# Altium PCB drive.PcbDoc
Units mil, origin at the board's own origin, x right, y up, seen from the top; angles counter-clockwise.
Board outline 5905.51 x 3937.01 mil, 2 copper layers (Top Layer, Bottom Layer); 75 components, 113 nets, 301 pads, 0 vias.
Unrouted connection lines stored in the file: 12.
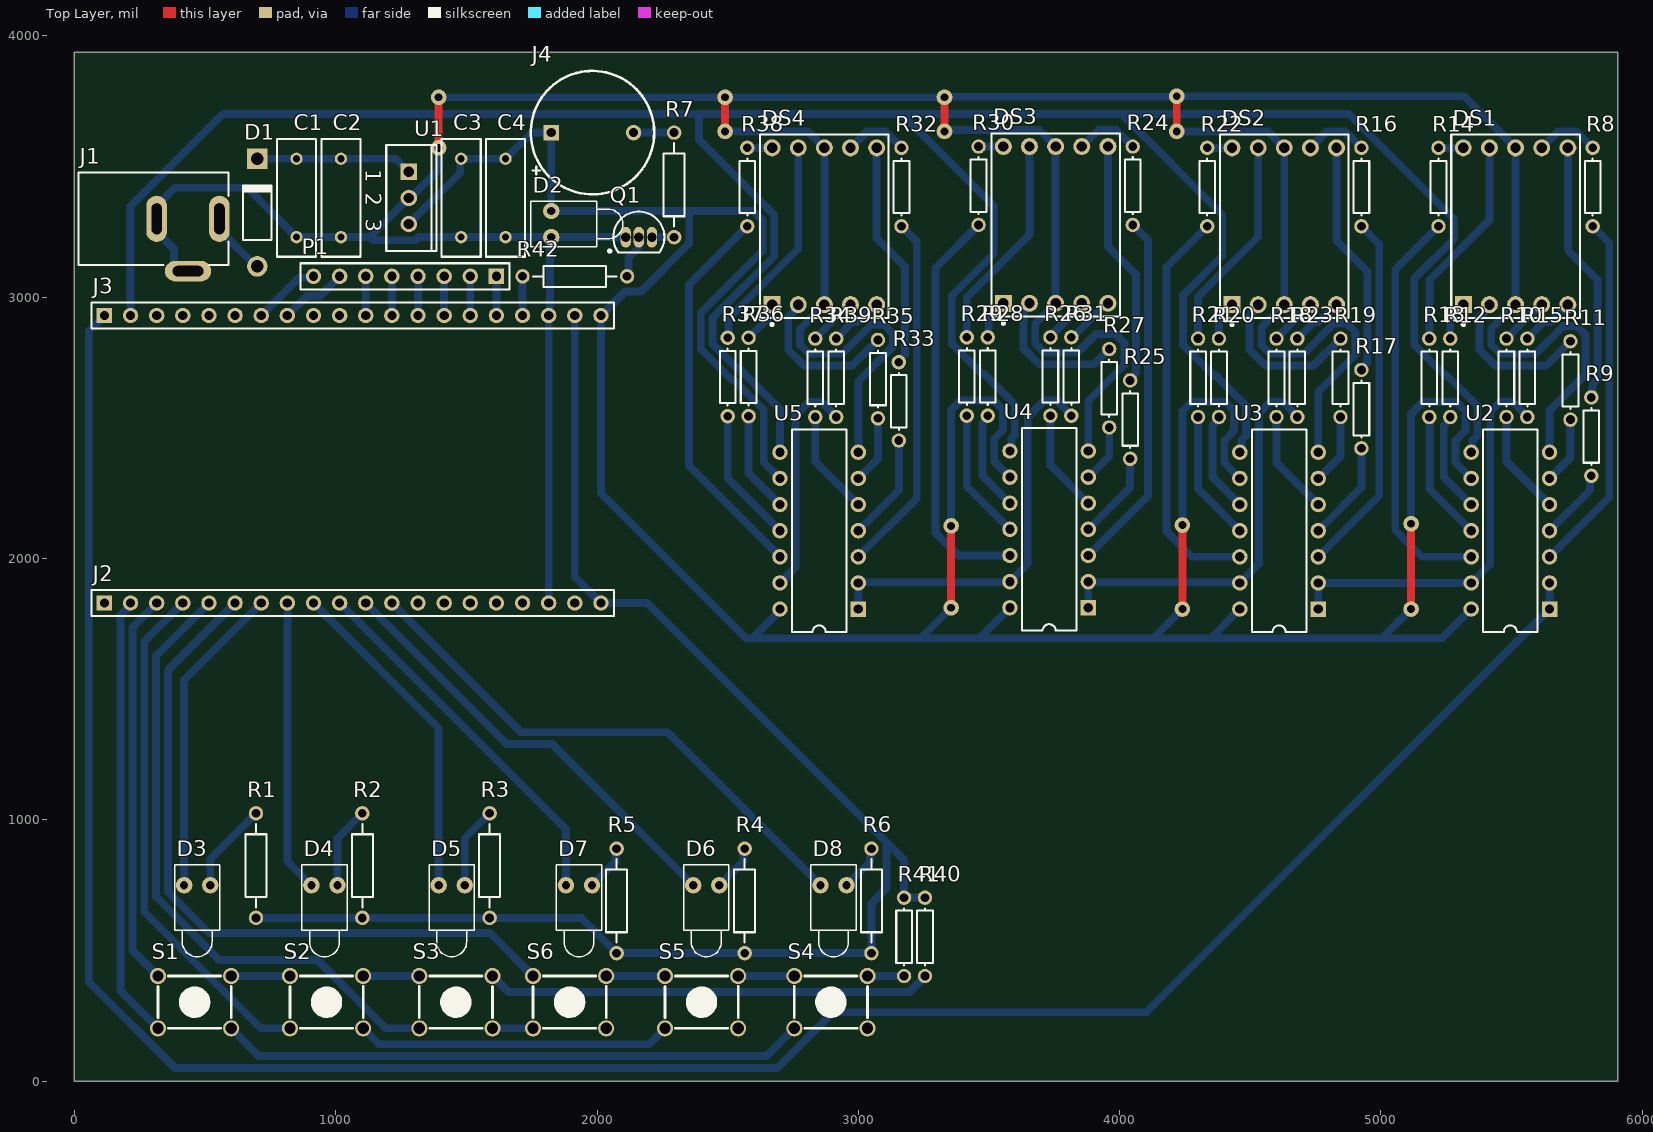
[diagram p0: Top Layer view]
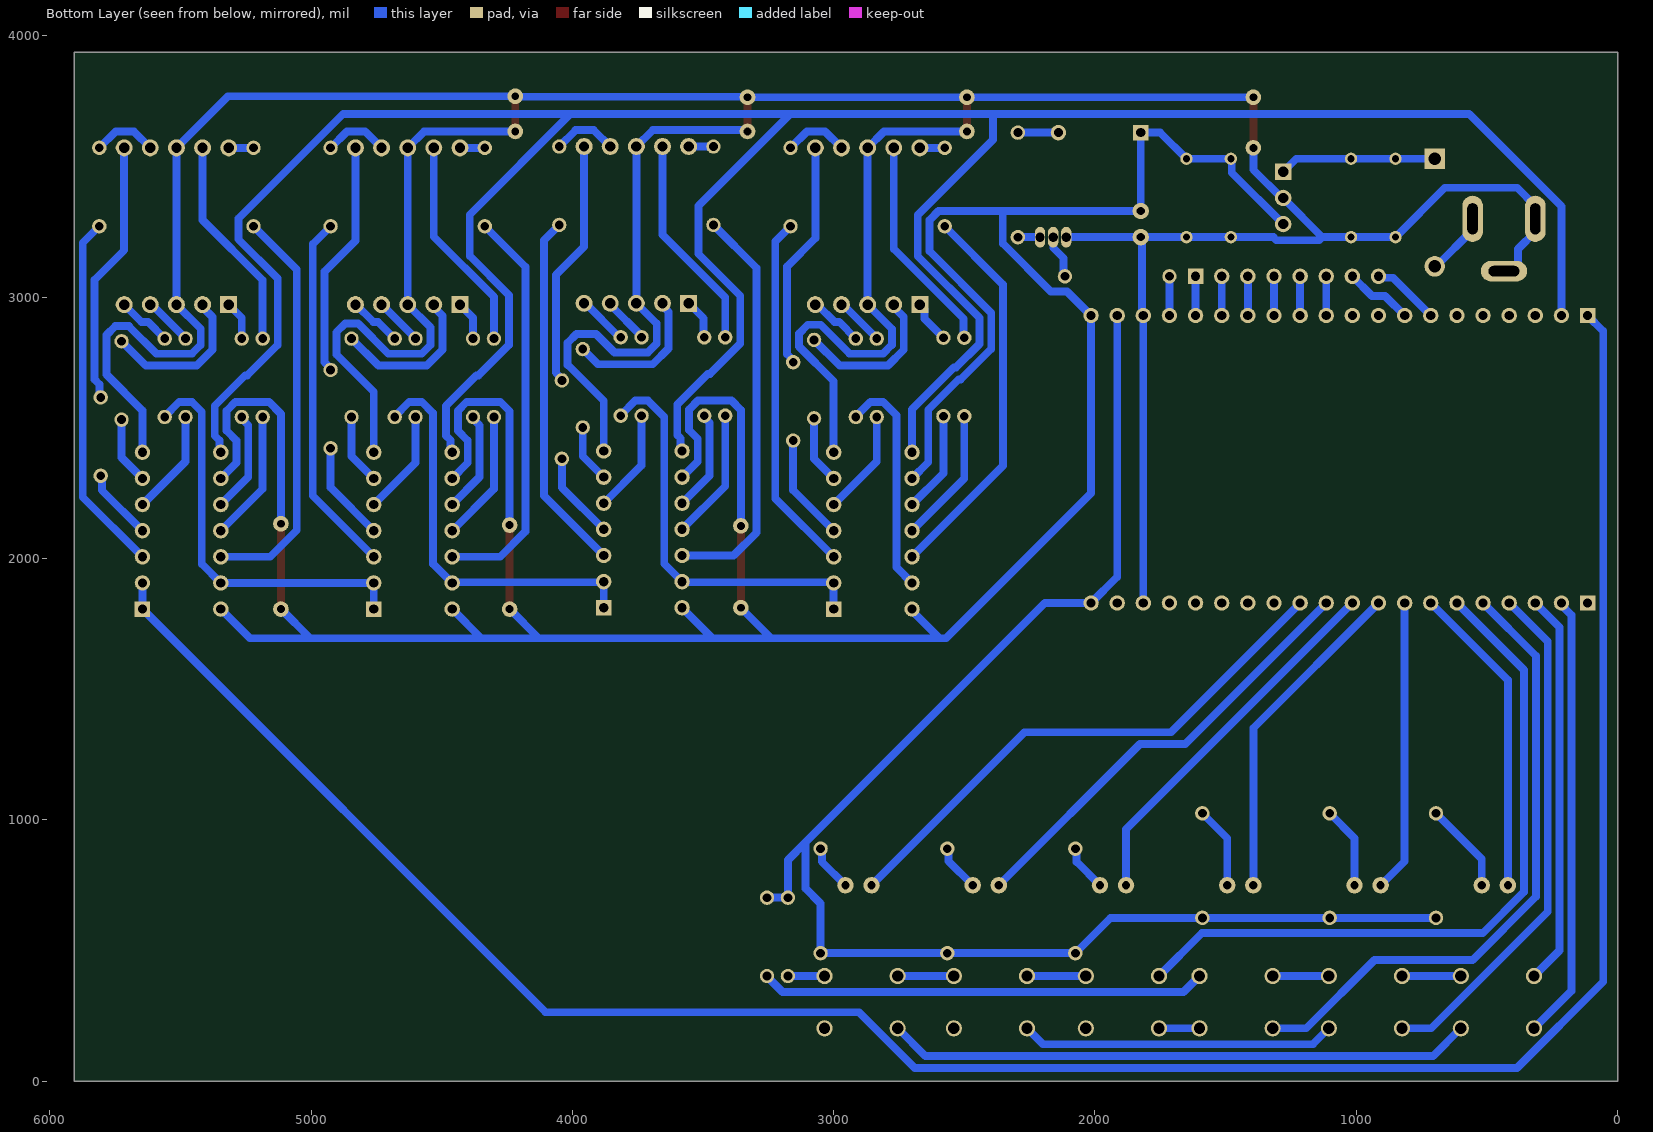
[diagram p1: Bottom Layer view, seen from below]

## Layer stack, top to bottom
Top Solder: solder mask 0.4, Solder Resist, Dk 3.5
Top Layer: signal copper 1.4
Dielectric 1: dielectric 12.6, FR-4, Dk 4.8
Bottom Layer: signal copper 1.4
Bottom Solder: solder mask 0.4, Solder Resist, Dk 3.5

## Board outline
0,0 0,3937.01 5905.51,3937.01 5905.51,0

## Design rules (kind name [scope] priority, off if disabled: settings)
Clearance [All] p1: gap=15.28 ignorepadtopadclearanceinfootprint=TRUE except(88: Arc-Poly Track-Poly SMDPad-Poly THPad-Poly Via-Poly Fill-Poly Poly-Poly)
HoleSize [All] p1: absolutevalues=TRUE maxlimit=100 minlimit=30 maxpercent=80.000 minpercent=20.000
PlaneConnect [All] p1: planeconnectstyle=Direct reliefexpansion=20 reliefentries=4 reliefconductorwidth=10 reliefairgap=10
PolygonConnect [All] p1: connectstyle=Direct reliefconductorwidth=10 reliefentries=4 polygonreliefangle="90 Angle" airgapwidth=10
RoutingVias [All] p1: holewidth=40 width=70 viastyle="Through Hole" minholewidth=40 minwidth=70 maxholewidth=40 maxwidth=70
SolderMaskExpansion [All] p1: expansion=4
UnRoutedNet [All] p1: checkbadconnections=TRUE
Width [All] p1: maxlimit=40 minlimit=30 preferedwidth=30 bottomlayer_maxwidth=30 minimp=50.000000 maximp=50.000000 favimp=50.000000
27 further rules are at their usual default settings.

## Components (designator, comment, footprint, x,y, rotation, side; value= is the part's Value field where it differs from the comment)
C1 "Cap" RAD-0.3 850,3380 r270 top value=0.1μF
C2 "Cap" RAD-0.3 1020,3380 r270 top value=330U/25
C3 "Cap" RAD-0.3 1480,3380 r270 top value=100U/16V
C4 "Cap" RAD-0.3 1650,3380 r270 top value=0.1μF
D1 "Diode 1N4007" DO-41 700,3324.09 r90 top
D2 "LED1" LED-1 1825,3280 r0 top
D3 "LED1" LED-1 469.99,750 r270 top
D4 "LED1" LED-1 956.99,750 r270 top
D5 "LED1" LED-1 1443.98,750 r270 top
D6 "LED1" LED-1 2417.99,750 r270 top
D7 "LED1" LED-1 1930.98,750 r270 top
D8 "LED1" LED-1 2904.99,750 r270 top
DS1 "HDSP-516Y" Case-5 5515,3271.7 r0 top
DS2 "HDSP-516Y" Case-5 4630,3271.7 r0 top
DS3 "HDSP-516Y" Case-5 3755,3276.7 r0 top
DS4 "HDSP-516Y" Case-5 2870,3271.7 r0 top
J1 "Phonejack2 TN" DC-005 590,3300 r180 top
J2 "Header 20" HDR1X20 115,1830 r0 top
J3 "Header 20" HDR1X20 115,2930 r0 top
J4 "BEEP" Beep 1982.48,3630 r0 top
P1 "Header 8" HDR1X8 1615,3080 r180 top
Q1 "2N3904" TO-92A 2160,3230 r270 top
R1 "Res2" AXIAL-0.4 695,825 r90 top value=1K
R2 "Res2" AXIAL-0.4 1102,825 r90 top value=1K
R3 "Res2" AXIAL-0.4 1589,825 r90 top value=1K
R4 "Res2" AXIAL-0.4 2565,690 r90 top value=1K
R5 "Res2" AXIAL-0.4 2075,690 r90 top value=1K
R6 "Res2" AXIAL-0.4 3050,690 r90 top value=1K
R7 "Res2" AXIAL-0.4 2295,3430 r90 top value=1k
R8 "Res1" AXIAL-0.3 5810,3421.7 r90 top value=470
R9 "Res1" AXIAL-0.3 5805,2466.7 r90 top value=470
R10 "Res1" AXIAL-0.3 5480,2691.7 r90 top value=470
R11 "Res1" AXIAL-0.3 5725,2681.7 r90 top value=470
R12 "Res1" AXIAL-0.3 5265,2691.7 r90 top value=470
R13 "Res1" AXIAL-0.3 5185,2691.7 r90 top value=470
R14 "Res1" AXIAL-0.3 5220,3421.7 r90 top value=470
R15 "Res1" AXIAL-0.3 5560,2691.7 r90 top value=470
R16 "Res1" AXIAL-0.3 4925,3421.7 r90 top value=470
R17 "Res1" AXIAL-0.3 4925,2571.7 r90 top value=470
R18 "Res1" AXIAL-0.3 4600,2691.7 r90 top value=470
R19 "Res1" AXIAL-0.3 4845,2691.7 r90 top value=470
R20 "Res1" AXIAL-0.3 4380,2691.7 r90 top value=470
R21 "Res1" AXIAL-0.3 4300,2691.7 r90 top value=470
R22 "Res1" AXIAL-0.3 4335,3421.7 r90 top value=470
R23 "Res1" AXIAL-0.3 4680,2691.7 r90 top value=470
R24 "Res1" AXIAL-0.3 4050,3426.7 r90 top value=470
R25 "Res1" AXIAL-0.3 4040,2531.7 r90 top value=470
R26 "Res1" AXIAL-0.3 3735,2696.7 r90 top value=470
R27 "Res1" AXIAL-0.3 3960,2651.7 r90 top value=470
R28 "Res1" AXIAL-0.3 3495.2,2696.7 r90 top value=470
R29 "Res1" AXIAL-0.3 3415,2696.7 r90 top value=470
R30 "Res1" AXIAL-0.3 3460,3426.7 r90 top value=470
R31 "Res1" AXIAL-0.3 3815,2696.98 r90 top value=470
R32 "Res1" AXIAL-0.3 3165,3421.7 r90 top value=470
R33 "Res1" AXIAL-0.3 3155,2601.7 r90 top value=470
R34 "Res1" AXIAL-0.3 2835,2691.7 r90 top value=470
R35 "Res1" AXIAL-0.3 3075,2686.7 r90 top value=470
R36 "Res1" AXIAL-0.3 2580,2695 r90 top value=470
R37 "Res1" AXIAL-0.3 2500,2695 r90 top value=470
R38 "Res1" AXIAL-0.3 2575,3421.7 r90 top value=470
R39 "Res1" AXIAL-0.3 2915,2691.7 r90 top value=470
R40 "Res1" AXIAL-0.3 3255,552.51 r90 top value=470
R41 "Res1" AXIAL-0.3 3175,552.51 r90 top value=470
R42 "Res2" AXIAL-0.4 1915,3080 r180 top value=1k
S1 "SW-PB" SW9 599.97,402.51 r0 top
S2 "SW-PB" SW9 1104.98,402.51 r0 top
S3 "SW-PB" SW9 1599.97,402.51 r0 top
S4 "SW-PB" SW9 3034.97,402.51 r0 top
S5 "SW-PB" SW9 2539.98,402.51 r0 top
S6 "SW-PB" SW9 2034.97,402.51 r0 top
U1 "MC7805ACT" 221A-06 1280,3380 r270 top
U2 "SN74HC164N" N014 5495,2106.7 r90 top
U3 "SN74HC164N" N014 4610,2106.7 r90 top
U4 "SN74HC164N" N014 3730,2111.7 r90 top
U5 "SN74HC164N" N014 2850,2106.7 r90 top

## Footprints (in the part's own frame and the unit in brackets; to place one, negate y for a bottom-side part, rotate by r counter-clockwise, add the part's x,y. Pads: shape width x height; smd on the part's side, far side on the other; paste and mask are expansions set on the pad)
221A-06 [mm] "TO, Thru-Hole, Vertical, Heatsink Mounted; 3 In-Line Leads; Pitch 2.54 mm"
  rect 1.6x1.6 hole 1: 1(-2.54,0)
  round 1.6 hole 1: 2(0,0) 3(2.54,0)
  silkscreen extent -5.15,-2.2 5.15,2.7
AXIAL-0.3 [mm] "Axial Device, Thru-Hole; 2 Leads; 0.3 in Pin Spacing"
  round 1.4 hole 0.85: 1(-3.81,0) 2(3.81,0)
  silkscreen extent -2.77,-0.76 2.77,0.76
AXIAL-0.4 [mm] "Axial Device, Thru-Hole; 2 Leads; 0.4 in Pin Spacing"
  round 1.4 hole 0.85: 1(-5.08,0) 2(5.08,0)
  silkscreen extent -4.06,-1.02 4.06,1.02
Beep [mm] "蜂鸣器"
  rect 1.5x1.5 hole 0.9: 1(-4,0)
  round 1.5 hole 0.9: 2(4,0)
  silkscreen extent -6,-6 6,6
Case-5 [mm] "LED, 7-Segment Display, 13 mm, RHD; 10 Leads; Row Space 15.24 mm; Pitch 2.54 mm"
  rect 1.65x1.65 hole 1: 1(-5.08,-7.62)
  round 1.65 hole 1: 2(-2.54,-7.62) 3(0,-7.62) 4(2.54,-7.62) 5(5.08,-7.62) 6(5.08,7.62) 7(2.54,7.62) 8(0,7.62) 9(-2.54,7.62) 10(-5.08,7.62)
  silkscreen extent -6.25,-9.67 6.25,8.9
DC-005 [mm] "DC母座5.5mm"
  oval 2x4.5 hole 1 slot 3 at 90 deg: 1(0.889,0) 2(6.985,0)
  oval 4.5x2 hole 1 slot 3 at 0 deg: 3(3.937,5.08)
  silkscreen extent 0,-4.5 14.6,4.5, body extent 0,-4.44 14.6,4.45, height 11
DO-41 [mm] "Diode, Axial; Body 5.2 x 2.7 mm (LxDia. max), Lead Dia. 0.86 mm (max)"
  round 2 hole 1.2: 1(-5.23,0)
  rect 2x2 hole 1.2: 2(5.23,0)
  silkscreen extent -2.65,-1.4 2.75,1.4
HDR1X8 [mm] "Connector; Header; 8 Position"
  rect 1.5x1.5 hole 0.9: 1(0,0)
  round 1.5 hole 0.9: 2(2.54,0) 3(5.08,0) 4(7.62,0) 5(10.16,0) 6(12.7,0) 7(15.24,0) 8(17.78,0)
  silkscreen extent -1.27,-1.27 19.05,1.27
HDR1X20 [mm] "Connector; Header; 20 Position"
  rect 1.5x1.5 hole 0.9: 1(0,0)
  round 1.5 hole 0.9: 2(2.54,0) 3(5.08,0) 4(7.62,0) 5(10.16,0) 6(12.7,0) 7(15.24,0) 8(17.78,0) 9(20.32,0) 10(22.86,0) 11(25.4,0) 12(27.94,0) 13(30.48,0) 14(33.02,0) 15(35.56,0) 16(38.1,0) 17(40.64,0) 18(43.18,0) 19(45.72,0) 20(48.26,0)
  silkscreen extent -1.27,-1.27 49.53,1.27
LED-1 [mm] "LED; 2 Leads"
  round 1.6 hole 0.8: 1(0,1.27) 2(0,-1.27)
  silkscreen extent -2,-2.2 6.95,2.2
N014 [mm] "DIP; 14 Leads; Row Spacing 7.62 mm; Pitch 2.54 mm"
  rect 1.5x1.5 hole 0.9: 1(-7.62,-3.81)
  round 1.5 hole 0.9: 2(-5.08,-3.81) 3(-2.54,-3.81) 4(0,-3.81) 5(2.54,-3.81) 6(5.08,-3.81) 7(7.62,-3.81) 8(7.62,3.81) 9(5.08,3.81) 10(2.54,3.81) 11(0,3.81) 12(-2.54,3.81) 13(-5.08,3.81) 14(-7.62,3.81)
  silkscreen extent -9.85,-2.65 9.85,2.65
RAD-0.3 [mm] "Radial Cap, Thru-Hole; 2 Leads; 0.3 in Pin Spacing"
  round 1.2 hole 0.7: 1(-3.81,0) 2(3.81,0)
  silkscreen extent -5.71,-1.91 5.71,1.91
SW9 [mil]
  round 62 hole 43.31: 1(-279.97,0) 1(0,0) 2(-279.97,-200) 2(0,-200)
  silkscreen extent -280,-200 0,0
TO-92A [mm] "TO, Flat Index; 3 In-Line, Axial Leads; Body Dia. 4.5mm; Leads 0.51 x 0.48 mm (max)"
  oval 2x1 hole 0.9: 1(0,-1.27) 2(0,0) 3(0,1.27)
  silkscreen extent -2.48,-2.95 1.5,2.48, body extent -2.48,-2.5 1.5,2.5, height 6.86

## Part data
C1 C2 C3 C4: "Capacitor", LatestRevisionDate=17-Jul-2002, LatestRevisionNote="Re-released for DXP Platform.", PackageDescription="Radial Cap, Thru-Hole; 2 Leads; 0.3 in Pin Spacing", PackageReference=RAD-0.3, Published=8-Jun-2000, Publisher="Altium Limited"
D1: "1 Amp General Purpose Rectifier", Code_JEDEC=DO-204-AL, ComponentLink1Description="Manufacturer Link", ComponentLink1URL=http://www.fairchildsemi.com/, ComponentLink2Description=Datasheet, ComponentLink2URL=http://www.fairchildsemi.com/ds/1N%2F1N4001.pdf, DatasheetVersion=1998, LatestRevisionDate=17-Jul-2002, LatestRevisionNote="Re-released for DXP Platform.", PackageDescription="Diode, Axial; Body 5.2 x 2.7 mm (LxDia. max), Lead Dia. 0.86 mm (max)", PackageReference=DO-41, PackageVersion=Aug-1999, Published=8-Jun-2000, Publisher="Altium Limited"
D2 D3 D4 D5 D6 D7 D8: "Typical RED GaAs LED", LatestRevisionDate=08-Jul-2005, LatestRevisionNote="Mech Layer 1 removed.", PackageDescription="LED; 2 Leads", PackageReference=LED-1, Published=8-Jun-2000, Publisher="Altium Limited"
DS1 DS2 DS3 DS4: "13 mm Slim Font, Standard Current, Yellow 7-Segment Display: CC, RH DP", LED_Colour=Yellow, PackageDocument=01-Oct-2001, ComponentLink1Description="Manufacturer Link", ComponentLink1URL=http://www.agilent.com/, ComponentLink2Description=Datasheet, ComponentLink2URL=http://cp.literature.agilent.com/litweb/pdf/5989-2640EN.pdf, DatasheetDocument=20-Jul-2001, LatestRevisionDate=11-Oct-2004, LatestRevisionNote="Display outline superimposed on PCB Footprint.", LuminousIntensity="450 ucd (Minimum).", PackageReference=Case-5, Published=26-May-2004, Publisher="Altium Limited"
J1: "Jack Socket, 1/4\" [6.5mm], Thru-Hole, Vertical, 2-Conductor with Tip closed", PackageDocument=2003, ComponentLink1Description="Manufacturer Link", ComponentLink1URL=http://www.cliffuk.co.uk/, DatasheetDocument=2003, DrillAndSlotSize="Corresponds to nominal value.", LatestRevisionDate=15-Jul-2004, LatestRevisionNote="Component Replaced & renamed from \"Phonejack\".", PackageReference=S1VS_SNB, PCB_Layout="Complies with manufacturer's recommendation.", Publisher="Altium Limited"
J2 J3: "Header, 20-Pin", LatestRevisionDate=17-Jul-2002, LatestRevisionNote="Re-released for DXP Platform.", Publisher="Altium Limited"
J4: "蜂鸣器"
P1: "Header, 8-Pin", LatestRevisionDate=17-Jul-2002, LatestRevisionNote="Re-released for DXP Platform.", Publisher="Altium Limited"
Q1: "NPN General Purpose Amplifier", ComponentLink1Description="Manufacturer Link", ComponentLink1URL=http://www.fairchildsemi.com/, ComponentLink2Description=Datasheet, ComponentLink2URL=http://www.fairchildsemi.com/ds/2N%2F2N3904.pdf, DatasheetVersion=1997, LatestRevisionDate=15-Jan-2003, LatestRevisionNote="PCB Footprint 'BCY-W3/D4.7' replaced", PackageDescription="TO, Flat Index; 3 In-Line, Axial Leads; Body Dia. 4.5mm; Leads 0.51 x 0.48 mm (max)", PackageReference=TO-92A, PackageVersion=Sep-1998, Published=8-Jun-2000, Publisher="Altium Limited"
R1 R2 R3 R4 R5 R6 R7 R8 R9 R10 R11 R12 R13 R14 R15 R16 R17 R18 R19 R20 R21 R22 R23 R24 R25 R26 R27 R28 R29 R30 R31 R32 R33 R34 R35 R36 R37 R38 R39 R40 R41 R42: "Resistor", LatestRevisionDate=17-Jul-2002, LatestRevisionNote="Re-released for DXP Platform.", Published=8-Jun-2000, Publisher="Altium Limited"
  R1 R2 R3 R4 R5 R6 R7 R42: PackageDescription="Axial Device, Thru-Hole; 2 Leads; 0.4 in Pin Spacing", PackageReference=AXIAL-0.4
  R8 R9 R10 R11 R12 R13 R14 R15 R16 R17 R18 R19 R20 R21 R22 R23 R24 R25 R26 R27 R28 R29 R30 R31 R32 R33 R34 R35 R36 R37 R38 R39 R40 R41: PackageDescription="Axial Device, Thru-Hole; 2 Leads; 0.3 in Pin Spacing", PackageReference=AXIAL-0.3
S1 S2 S3 S4 S5 S6: "微动开关", LatestRevisionDate=17-Jul-2002, LatestRevisionNote="Re-released for DXP Platform.", PackageReference=SPST-2, Published=24-Mar-1999, Publisher="Altium Limited"
U1: "Three-Terminal Positive Voltage Regulator", Code_JEDEC=TO-262-AA, ComponentLink1Description="Manufacturer Link", ComponentLink1URL=http://www.onsemi.com/site/products/taxonomy/0,4438,503,00.html, ComponentLink2Description=Datasheet, ComponentLink2URL=http://www.onsemi.com/pub/Collateral/MC7800-D.PDF, DatasheetVersion=1997, Note="Heatsink surface is connected to Pin 2", PackageDescription="TO, Thru-Hole, Vertical, Heatsink Mounted; 3 In-Line Leads; Pitch 2.54 mm", PackageReference=221A-06, PackageVersion=1997, Published=15-Apr-2002, Publisher="Altium Limited"
U2 U3 U4 U5: "8-Bit Parallel-Out Serial Shift Register", ComponentLink1Description="Manufacturer Link", ComponentLink1URL=http://www.ti.com/, ComponentLink2Description=Datasheet, ComponentLink2URL=http://www-s.ti.com/sc/ds/sn74hc164.pdf, DatasheetVersion=May-1997, LatestRevisionDate=04-Mar-2005, LatestRevisionNote="Stylized 3D Model Added.", PackageDescription="DIP; 14 Leads; Row Spacing 7.62 mm; Pitch 2.54 mm", PackageReference=N014, PackageVersion=Oct-1995, Published=8-Jun-2000, Publisher="Altium Limited"

## Free pads (board coordinates)
  round 60 hole 30: 2(3329.72,3634.46) 2(3355,1811.7) 2(3355,2125) 2(4218.24,3634.46) 2(4240,1806.7) 2(4240,2128.3) 2(5115,1806.7) 2(5115,2133.3) 3(1393.98,3571.7) 3(1393.98,3765) 3(2490,3634.46) 3(2490,3765) 3(3329.72,3765) 3(4218.24,3769.13)

## Nets (pads, with @x,y where several pads share a name; then routed paths per layer and width w, separated by ;. In a path a pad name is that pad's centre, name@x,y a point inside that pad or via, vN(x,y) a via of type N, cw(c..) or ccw(c..) an arc to the next point about the centre after c; other vN are vias at no path point)
3V3: J2.20 J3.19 R1.1 R2.1 R3.1 R4.1 R5.1 R6.1 R40.2 R41.2 | length 5791.8
  Bottom Layer w30: R1.1 1940,625 R5.1 R6.1 3050,680.12 3107.83,737.95 3107.83,913.96 ; J3.19 1915,1930 J2.20 2191.79,1830 3107.83,913.96 ; R40.2 R41.2 3175,846.79 3107.83,913.96
5V: C3.1 C4.1 D2.1 J3.20 J4.1 pad.2@3355,1811.7 pad.2@3355,2125 pad.2@4240,1806.7 pad.2@4240,2128.3 pad.2@5115,1806.7 pad.2@5115,2133.3 U1.3 U2.9 U2.14 U3.9 U3.14 U4.9 U4.14 U5.9 U5.14 | length 12730.5
  Top Layer w30: pad.2@3355,1811.7 pad.2@3355,2125 ; pad.2@4240,1806.7 pad.2@4240,2128.3 ; pad.2@5115,1806.7 pad.2@5115,2133.3
  Bottom Layer w30: U1.3 1476.7,3476.7 1476.7,3526.7 C3.1 C4.1 1750,3630 J4.1 D2.1 2352.83,3330 ; U5.14 2700,1800 2595,1695 ; U5.9 2637.83,2368.87 2637.83,2568.96 2521.17,2685.62 2513.56,2685.62 2396.89,2802.29 2396.89,2939.95 2632.83,3175.89 2632.83,3295.66 2598.49,3330 2352.83,3330 ; pad.2@3355,1811.7 3238.3,1695 ; pad.2@3355,2125 3355,2568.49 3391.04,2604.54 3519.15,2604.54 3553.03,2570.66 3553.03,2491.43 3520.2,2458.59 3520.2,2371.5 U4.9 ; U4.14 3463.3,1695 ; pad.2@4240,1806.7 4128.3,1695 ; pad.2@4240,2128.3 4240,2563.49 4276.04,2599.54 4403.96,2599.54 4437.83,2565.66 4437.83,2488.83 4400.2,2451.19 4400.2,2366.5 U3.9 ; U3.14 4348.3,1695 ; pad.2@5115,1806.7 5003.3,1695 ; pad.2@5115,2133.3 5115,2553.49 5161.04,2599.54 5288.96,2599.54 5322.83,2565.66 5322.83,2488.83 5285.2,2451.19 5285.2,2366.5 U2.9 ; U2.14 5233.3,1695 5003.3,1695 ; 2352.83,3330 2352.83,3206.04 2168.96,3022.17 2107.17,3022.17 J3.20 2015,2250.15 2570.15,1695 2595,1695 ; 2595,1695 3238.3,1695 ; 3238.3,1695 3463.3,1695 ; 3463.3,1695 4128.3,1695 ; 4128.3,1695 4348.3,1695 ; 4348.3,1695 5003.3,1695
9V: C1.1 C2.1 D1.2 U1.1 | length 600.7
  Bottom Layer w30: D1.2 1230,3530 U1.1
GND: C1.2 C2.2 C3.2 C4.2 D2.2 DS1.3 DS1.8 DS2.3 DS2.8 DS3.3 DS3.8 DS4.3 DS4.8 J1.2 J1.3 J2.18 J3.18 pad.2@3329.72,3634.46 pad.2@4218.24,3634.46 pad.3 Q1.1 U1.2 U2.7 U3.7 U4.7 U5.7 | length 16941.7
  Top Layer w30: pad.3@1393.98,3571.7 pad.3@1393.98,3765 ; pad.3@2490,3634.46 pad.3@2490,3765 ; pad.2@3329.72,3634.46 pad.3@3329.72,3765 ; pad.2@4218.24,3634.46 pad.3@4218.24,3769.13
  Bottom Layer w30: J1.2@315,3250.79 381.42,3184.37 381.42,3104.37 J1.3@385.79,3100 ; J1.2 315,3349.21 384.65,3418.86 661.14,3418.86 C1.2 1130,3230 ; pad.3@1393.98,3571.7 1393.98,3488.18 1285.81,3380 U1.2 1130,3230 ; pad.3@1393.98,3765 pad.3@3329.72,3765 ; J2.18 J3.18 1820,2935 1820,3225 D2.2 ; Q1.1 D2.2 ; pad.3@2490,3634.46 2807.24,3634.46 DS4.8 DS4.3 2777.17,2878.87 2777.17,2817.74 2811.04,2783.87 2938.96,2783.87 3049.63,2894.54 3098.96,2894.54 3132.83,2860.66 3132.83,2811.33 3000,2678.49 U5.7 ; pad.3@3331.78,3767.07 pad.3@4216.18,3767.07 ; pad.2@3334.86,3634.46 3339.86,3639.46 3692.24,3639.46 DS3.8 DS3.3 3677.17,2898.87 3677.17,2822.74 3711.04,2788.87 3838.68,2788.87 3909.35,2859.54 3983.96,2859.54 4017.83,2825.66 4017.83,2741.33 3880,2603.49 U4.7 ; pad.2@4218.24,3634.46 4567.24,3634.46 DS2.8 DS2.3 4542.17,2883.87 4542.17,2817.74 4576.04,2783.87 4704.07,2783.87 4819.74,2899.54 4868.96,2899.54 4902.83,2865.66 4902.83,2781.33 4760,2638.49 U3.7 ; pad.3@4218.24,3769.13 5317.57,3769.13 DS1.8 DS1.3 5422.17,2878.87 5422.17,2817.74 5456.04,2783.87 5591.19,2783.87 5696.86,2889.54 5748.96,2889.54 5782.83,2855.66 5782.83,2704.03 5645,2566.19 U2.7 ; 1130,3230 1141.77,3218.23 1305.59,3218.23 1317.36,3230 D2.2
NetD1_1: D1.1 J1.1 | length 245.5
  Bottom Layer w30: J1.1 555,3256.99 693.8,3118.19 D1.1
NetD3_1: D3.1 R1.2 | length 347.5
  Bottom Layer w30: D3.1 519.99,849.99 R1.2
NetD4_1: D4.1 R2.2 | length 314.4
  Bottom Layer w30: D4.1 1006.99,929.99 R2.2
NetD5_1: D5.1 R3.2 | length 314.4
  Bottom Layer w30: D5.1 1493.98,929.99 R3.2
NetD6_1: D6.1 R4.2 | length 180.2
  Bottom Layer w30: D6.1 2560.19,842.21 2560.19,885.19 R4.2
NetD7_1: D7.1 R5.2 | length 178.9
  Bottom Layer w30: D7.1 2070.19,839.21 2070.19,885.19 R5.2
NetD8_1: D8.1 R6.2 | length 179.4
  Bottom Layer w30: D8.1 3045.19,840.21 3045.19,885.19 R6.2
NetDS1_1: DS1.1 R12.2 | length 150.7
  Bottom Layer w30: R12.2 5265,2921.7 DS1.1
NetDS1_2: DS1.2 R11.2 | length 600.2
  Bottom Layer w30: DS1.2 5415,2962.24 5376.89,2924.13 5376.89,2798.99 5437.29,2738.59 5631.89,2738.59 R11.2
NetDS1_4: DS1.4 R10.2 | length 189.9
  Bottom Layer w30: R10.2 5480,2843.49 5608.21,2971.7 DS1.4
NetDS1_5: DS1.5 R15.2 | length 208.8
  Bottom Layer w30: R15.2 5624.06,2905.76 5649.06,2905.76 DS1.5
NetDS1_6: DS1.6 R9.2 | length 1011.4
  Bottom Layer w30: DS1.6 5715,3180.31 5828.11,3067.2 5828.11,2685.27 5809.81,2666.97 5809.81,2621.51 R9.2
NetDS1_7: DS1.7 R8.2 | length 247
  Bottom Layer w30: DS1.7 5677.76,3634.46 5747.24,3634.46 R8.2
NetDS1_9: DS1.9 R13.2 | length 825.3
  Bottom Layer w30: R13.2 5185,3065.37 5415,3295.37 DS1.9
NetDS1_10: DS1.10 R14.2 | length 95
  Bottom Layer w30: R14.2 DS1.10
NetDS2_1: DS2.1 R20.2 | length 150.7
  Bottom Layer w30: R20.2 4380,2921.7 DS2.1
NetDS2_2: DS2.2 R19.2 | length 602.3
  Bottom Layer w30: DS2.2 4530,2962.24 4496.89,2929.13 4496.89,2798.99 4557.29,2738.59 4741.89,2738.59 R19.2
NetDS2_4: DS2.4 R18.2 | length 184.9
  Bottom Layer w30: R18.2 4600,2843.49 4728.21,2971.7 DS2.4
NetDS2_5: DS2.5 R23.2 | length 203.8
  Bottom Layer w30: R23.2 4744.06,2905.76 4761.94,2905.76 4827.88,2971.7 DS2.5
NetDS2_6: DS2.6 R17.2 | length 908.5
  Bottom Layer w30: DS2.6 4830,3215.98 4948.11,3097.87 4948.11,2751.61 4925,2728.5 R17.2
NetDS2_7: DS2.7 R16.2 | length 247
  Bottom Layer w30: DS2.7 4792.76,3634.46 4862.24,3634.46 R16.2
NetDS2_9: DS2.9 R21.2 | length 825.3
  Bottom Layer w30: R21.2 4300,3001.34 4530,3231.34 DS2.9
NetDS2_10: DS2.10 R22.2 | length 95
  Bottom Layer w30: R22.2 DS2.10
NetDS3_1: DS3.1 R28.2 | length 154.8
  Bottom Layer w30: R28.2 3497.56,2849.06 3497.56,2919.26 DS3.1
NetDS3_2: DS3.2 R27.2 | length 559.5
  Bottom Layer w30: DS3.2 3655,2967.24 3631.89,2944.13 3631.89,2803.99 3692.29,2743.59 3901.89,2743.59 R27.2
NetDS3_4: DS3.4 R26.2 | length 179.7
  Bottom Layer w30: R26.2 3735,2851.7 3855,2971.7 DS3.4
NetDS3_5: DS3.5 R31.2 | length 193.7
  Bottom Layer w30: R31.2 3820.14,2846.98 3949.86,2976.7 DS3.5
NetDS3_6: DS3.6 R25.2 | length 949.4
  Bottom Layer w30: DS3.6 3955,3193.48 4063.11,3085.37 4063.11,2711.61 4040,2688.5 R25.2
NetDS3_7: DS3.7 R24.2 | length 247
  Bottom Layer w30: DS3.7 3917.76,3639.46 3987.24,3639.46 R24.2
NetDS3_9: DS3.9 R29.2 | length 829.4
  Bottom Layer w30: R29.2 3415,2999.31 3655,3239.31 DS3.9
NetDS3_10: DS3.10 R30.2 | length 95
  Bottom Layer w30: R30.2 DS3.10
NetDS4_1: DS4.1 R36.2 | length 164
  Bottom Layer w30: R36.2 2652.52,2917.52 2652.52,2954.22 DS4.1
NetDS4_2: DS4.2 R35.2 | length 597.3
  Bottom Layer w30: DS4.2 2770,2962.24 2731.89,2924.13 2731.89,2798.99 2792.29,2738.59 2976.89,2738.59 R35.2
NetDS4_4: DS4.4 R34.2 | length 189.9
  Bottom Layer w30: R34.2 2835,2843.49 2963.21,2971.7 DS4.4
NetDS4_5: DS4.5 R39.2 | length 208.8
  Bottom Layer w30: R39.2 2979.06,2905.76 2996.82,2905.76 3062.76,2971.7 DS4.5
NetDS4_6: DS4.6 R33.2 | length 874.4
  Bottom Layer w30: DS4.6 3070,3225.98 3178.11,3117.87 3178.11,2781.61 3155,2758.5 R33.2
NetDS4_7: DS4.7 R32.2 | length 247
  Bottom Layer w30: DS4.7 3032.76,3634.46 3102.24,3634.46 R32.2
NetDS4_9: DS4.9 R37.2 | length 838.5
  Bottom Layer w30: R37.2 2502.56,2847.56 2502.56,2917.56 2770,3185 DS4.9
NetDS4_10: DS4.10 R38.2 | length 95
  Bottom Layer w30: R38.2 DS4.10
NetJ4_2: J4.2 R7.2 | length 155
  Bottom Layer w30: J4.2 R7.2
NetQ1_2: Q1.2 R42.1 | length 168.6
  Bottom Layer w30: R42.1 2119.81,3084.81 2119.81,3149.47 2159.96,3189.62 2159.96,3205.99 2160,3206.03 Q1.2
NetQ1_3: Q1.3 R7.1 | length 85
  Bottom Layer w30: Q1.3 R7.1
NetR8_1: R8.1 U2.3 | length 1385.9
  Bottom Layer w30: U2.3 5873.39,2235.09 5873.39,3208.31 R8.1
NetR9_1: R9.1 U2.4 | length 276.3
  Bottom Layer w30: U2.4 5800.19,2261.89 5800.19,2311.89 R9.1
NetR10_1: R10.1 U2.5 | length 403.3
  Bottom Layer w30: R10.1 5480,2371.7 U2.5
NetR11_1: R11.1 U2.6 | length 258.1
  Bottom Layer w30: U2.6 5725,2386.7 R11.1
NetR12_1: R12.1 U2.10 | length 388.9
  Bottom Layer w30: R12.1 5265,2534.9 5239.92,2509.82 5239.92,2311.78 U2.10
NetR13_1: R13.1 U2.11 | length 501.3
  Bottom Layer w30: R13.1 5185,2266.7 U2.11
NetR14_1: R14.1 U2.12 | length 1564.2
  Bottom Layer w30: R14.1 5054.72,3106.43 5054.72,2108.33 5156.36,2006.7 U2.12
NetR15_1: R15.1 U2.13 U3.1 U3.2 | length 1552.8
  Bottom Layer w30: U3.1 U3.2 U2.13 5418.11,1979.81 5418.11,2561.6 5456.04,2599.54 5503.96,2599.54 5560,2543.49 R15.1
NetR16_1: R16.1 U3.3 | length 1390
  Bottom Layer w30: U3.3 4993.39,2240.09 4993.39,3203.31 R16.1
NetR17_1: R17.1 U3.4 | length 383.3
  Bottom Layer w30: U3.4 4925,2271.7 R17.1
NetR18_1: R18.1 U3.5 | length 401.3
  Bottom Layer w30: R18.1 4600,2366.7 U3.5
NetR19_1: R19.1 U3.6 | length 270.2
  Bottom Layer w30: U3.6 4845,2391.7 R19.1
NetR20_1: R20.1 U3.10 | length 388.9
  Bottom Layer w30: R20.1 4380,2534.9 4354.92,2509.82 4354.92,2311.78 U3.10
NetR21_1: R21.1 U3.11 | length 501.3
  Bottom Layer w30: R21.1 4300,2266.7 U3.11
NetR22_1: R22.1 U3.12 | length 1553
  Bottom Layer w30: R22.1 4179.72,3116.43 4179.72,2103.33 4276.36,2006.7 U3.12
NetR23_1: R23.1 U3.13 U4.1 U4.2 | length 1551.9
  Bottom Layer w30: U4.1 U4.2 3882.5,1909.2 4457.5,1909.2 U3.13 4533.11,1979.81 4533.11,2556.6 4576.04,2599.54 4623.96,2599.54 4680,2543.49 R23.1
NetR24_1: R24.1 U4.3 | length 1383.8
  Bottom Layer w30: U4.3 4108.39,2240.09 4108.39,3218.31 R24.1
NetR25_1: R25.1 U4.4 | length 336.3
  Bottom Layer w30: U4.4 4040,2271.7 R25.1
NetR26_1: R26.1 U4.5 | length 395.1
  Bottom Layer w30: R26.1 3735,2356.7 U4.5
NetR27_1: R27.1 U4.6 | length 223.1
  Bottom Layer w30: U4.6 3960,2391.7 R27.1
NetR28_1: R28.1 U4.10 | length 386.9
  Bottom Layer w30: R28.1 3495.2,2539.9 3474.92,2519.63 3474.92,2316.78 U4.10
NetR29_1: R29.1 U4.11 | length 503.3
  Bottom Layer w30: R29.1 3415,2276.7 U4.11
NetR30_1: R30.1 U4.12 | length 1567
  Bottom Layer w30: R30.1 3294.72,3111.43 3294.72,2100.03 3383.06,2011.7 U4.12
NetR31_1: R31.1 U4.13 U5.1 U5.2 | length 1557.9
  Bottom Layer w30: U5.1 U5.2 3002.5,1909.2 3577.5,1909.2 3648.31,1980.01 3648.31,2541.8 3711.04,2604.54 3758.96,2604.54 3815,2548.49 R31.1
NetR32_1: R32.1 U5.3 | length 1381.7
  Bottom Layer w30: U5.3 3223.39,2230.09 3223.39,3213.31 R32.1
NetR33_1: R33.1 U5.4 | length 409.2
  Bottom Layer w30: U5.4 3155,2261.7 R33.1
NetR34_1: R34.1 U5.5 | length 403.3
  Bottom Layer w30: R34.1 2835,2371.7 U5.5
NetR35_1: R35.1 U5.6 | length 261.1
  Bottom Layer w30: U5.6 3075,2381.7 R35.1
NetR36_1: R36.1 U5.10 | length 388
  Bottom Layer w30: R36.1 2580,2326.7 U5.10
NetR37_1: R37.1 U5.11 | length 521.1
  Bottom Layer w30: R37.1 2500,2306.7 U5.11
NetR38_1: R38.1 U5.12 | length 1501.8
  Bottom Layer w30: R38.1 2351.61,3048.31 2351.61,2355.09 U5.12
NetR39_1: R39.1 U5.13 | length 867.8
  Bottom Layer w30: U5.13 2759.8,1966.5 2759.8,2548.29 2811.04,2599.54 2858.96,2599.54 2915,2543.49 R39.1
PA0: J2.5 S3.2 S6.2 | length 2578.5
  Bottom Layer w30: J2.5 312.94,1627.94 312.94,705.66 554.82,463.78 930.37,463.78 1191.64,202.51 S3.2@1320,202.51 ; S3.2@1599.97,202.51 S6.2@1755,202.51
PA1: J2.6 R41.1 S4.1 S5.1 S6.1 | length 3322.2
  Bottom Layer w30: J2.6 358.21,1573.21 358.21,724.41 516.11,566.52 1590.98,566.52 S6.1@1755,402.51 ; S6.1@2034.97,402.51 S5.1@2260.01,402.51 ; S5.1@2539.98,402.51 S4.1@2755,402.51 ; S4.1@3034.97,402.51 R41.1
PA2: D3.2 J2.7 | length 1202.2
  Bottom Layer w30: D3.2 419.99,1534.98 J2.7
PA3: D4.2 J2.8 | length 1118.1
  Bottom Layer w30: J2.8 815,841.99 D4.2
PA4: D5.2 J2.9 | length 1278.4
  Bottom Layer w30: J2.9 1393.98,1351.02 D5.2
PA5: D7.2 J2.10 | length 1438.7
  Bottom Layer w30: J2.10 1880.98,964.01 D7.2
PA6: D6.2 J2.11 | length 1700.3
  Bottom Layer w30: J2.11 1654.62,1290.38 1827.61,1290.38 D6.2
PA7: D8.2 J2.12 | length 2087.3
  Bottom Layer w30: J2.12 1709.35,1335.65 2269.33,1335.65 D8.2
PA8: J3.13 P1.4 | length 150
  Bottom Layer w30: J3.13 P1.4
PA11: J3.10
PA12: J3.9
PB0: J2.13
PB1: J2.14
PB2: J2.15
PB4: J3.6
PB5: J3.5
PB6: J3.4
PB7: J3.3
PB8: J3.2 U2.8 U3.8 U4.8 U5.8 | length 11733
  Bottom Layer w30: J3.2 215,3347.71 569.07,3701.77 2390,3701.77 ; U5.8 2700,2570.82 2539.92,2730.9 2532.31,2730.9 2442.17,2821.04 2442.17,2921.19 2678.11,3157.14 2678.11,3314.41 2390,3602.52 2390,3701.77 ; U4.8 3585.56,2417.26 3585.56,2459.93 3598.31,2472.67 3598.31,2589.41 3481.64,2706.08 3473.83,2706.08 3357.17,2822.74 3357.17,3005.51 3517.83,3166.18 3517.83,3348.94 3165,3701.77 ; U3.8 4465.56,2412.26 4465.56,2452.53 4483.11,2470.08 4483.11,2584.41 4366.44,2701.08 4358.83,2701.08 4242.17,2817.74 4242.17,3007.53 4392.83,3158.2 4392.83,3315.66 4006.72,3701.77 ; U2.8 5350.56,2412.26 5350.56,2452.53 5368.11,2470.08 5368.11,2584.41 5251.44,2701.08 5243.83,2701.08 5127.17,2817.74 5127.17,3071.56 5277.83,3222.23 5277.83,3300.66 4876.72,3701.77 4006.72,3701.77 ; 2390,3701.77 3165,3701.77 ; 3165,3701.77 4006.72,3701.77
PB9: J3.1 U2.1 U2.2 | length 9128
  Bottom Layer w30: J3.1 55.2,2870.2 55.2,380.65 385.17,50.68 2689.83,50.68 2902.93,263.78 4102.08,263.78 U2.1 U2.2
PB10: J2.16
PB11: J2.17
PB12: J3.17 R42.2 | length 150
  Bottom Layer w30: J3.17 R42.2
PB13: J3.16 P1.1 | length 150
  Bottom Layer w30: J3.16 P1.1
PB14: J3.15 P1.2 | length 150
  Bottom Layer w30: J3.15 P1.2
PB15: J3.14 P1.3 | length 150
  Bottom Layer w30: J3.14 P1.3
PC13: J2.2 S1.2 S4.2 | length 3945.7
  Bottom Layer w30: J2.2 215,1822.14 177.11,1784.25 177.11,345.39 S1.2@320,202.51 ; S1.2@599.97,202.51 706.52,95.95 2648.45,95.95 S4.2@2755,202.51
PC14: J2.3 R40.1 S1.1 S2.1 S3.1 | length 3653.2
  Bottom Layer w30: J2.3 222.39,1737.39 222.39,500.12 S1.1@320,402.51 ; S1.1@599.97,402.51 S2.1@825.01,402.51 ; S2.1@1104.98,402.51 S3.1@1320,402.51 ; S3.1@1599.97,402.51 1661.25,341.23 3195.51,341.23 3255,400.72 R40.1
PC15: J2.4 S2.2 S5.2 | length 3190.6
  Bottom Layer w30: J2.4 267.66,1682.66 267.66,648.16 713.31,202.51 S2.2@825.01,202.51 ; S2.2@1104.98,202.51 1166.26,141.23 2198.74,141.23 S5.2@2260.01,202.51
RXD1: J3.11 P1.6 | length 150
  Bottom Layer w30: J3.11 P1.6
TDI: J3.8 P1.7 | length 262.1
  Bottom Layer w30: J3.8 890,3005 940,3005 P1.7
TDO: J3.7 P1.8 | length 262.1
  Bottom Layer w30: J3.7 859.44,3074.44 909.44,3074.44 P1.8
TXD1: J3.12 P1.5 | length 150
  Bottom Layer w30: J3.12 P1.5
VBAT: J2.1
VDDA: J2.19

## Text inside footprints (layer, text, board x,y; h text height)
U1: Top Overlay "1" at 1115.63,3489.84 h59.06 r270; Top Overlay "2" at 1115.63,3399.68 h59.06 r270; Top Overlay "3" at 1115.63,3299.68 h59.06 r270